# EAGLE board Papa_Soundie-Panel_v10 (EAGLE 7.7.0), part 1 of 7
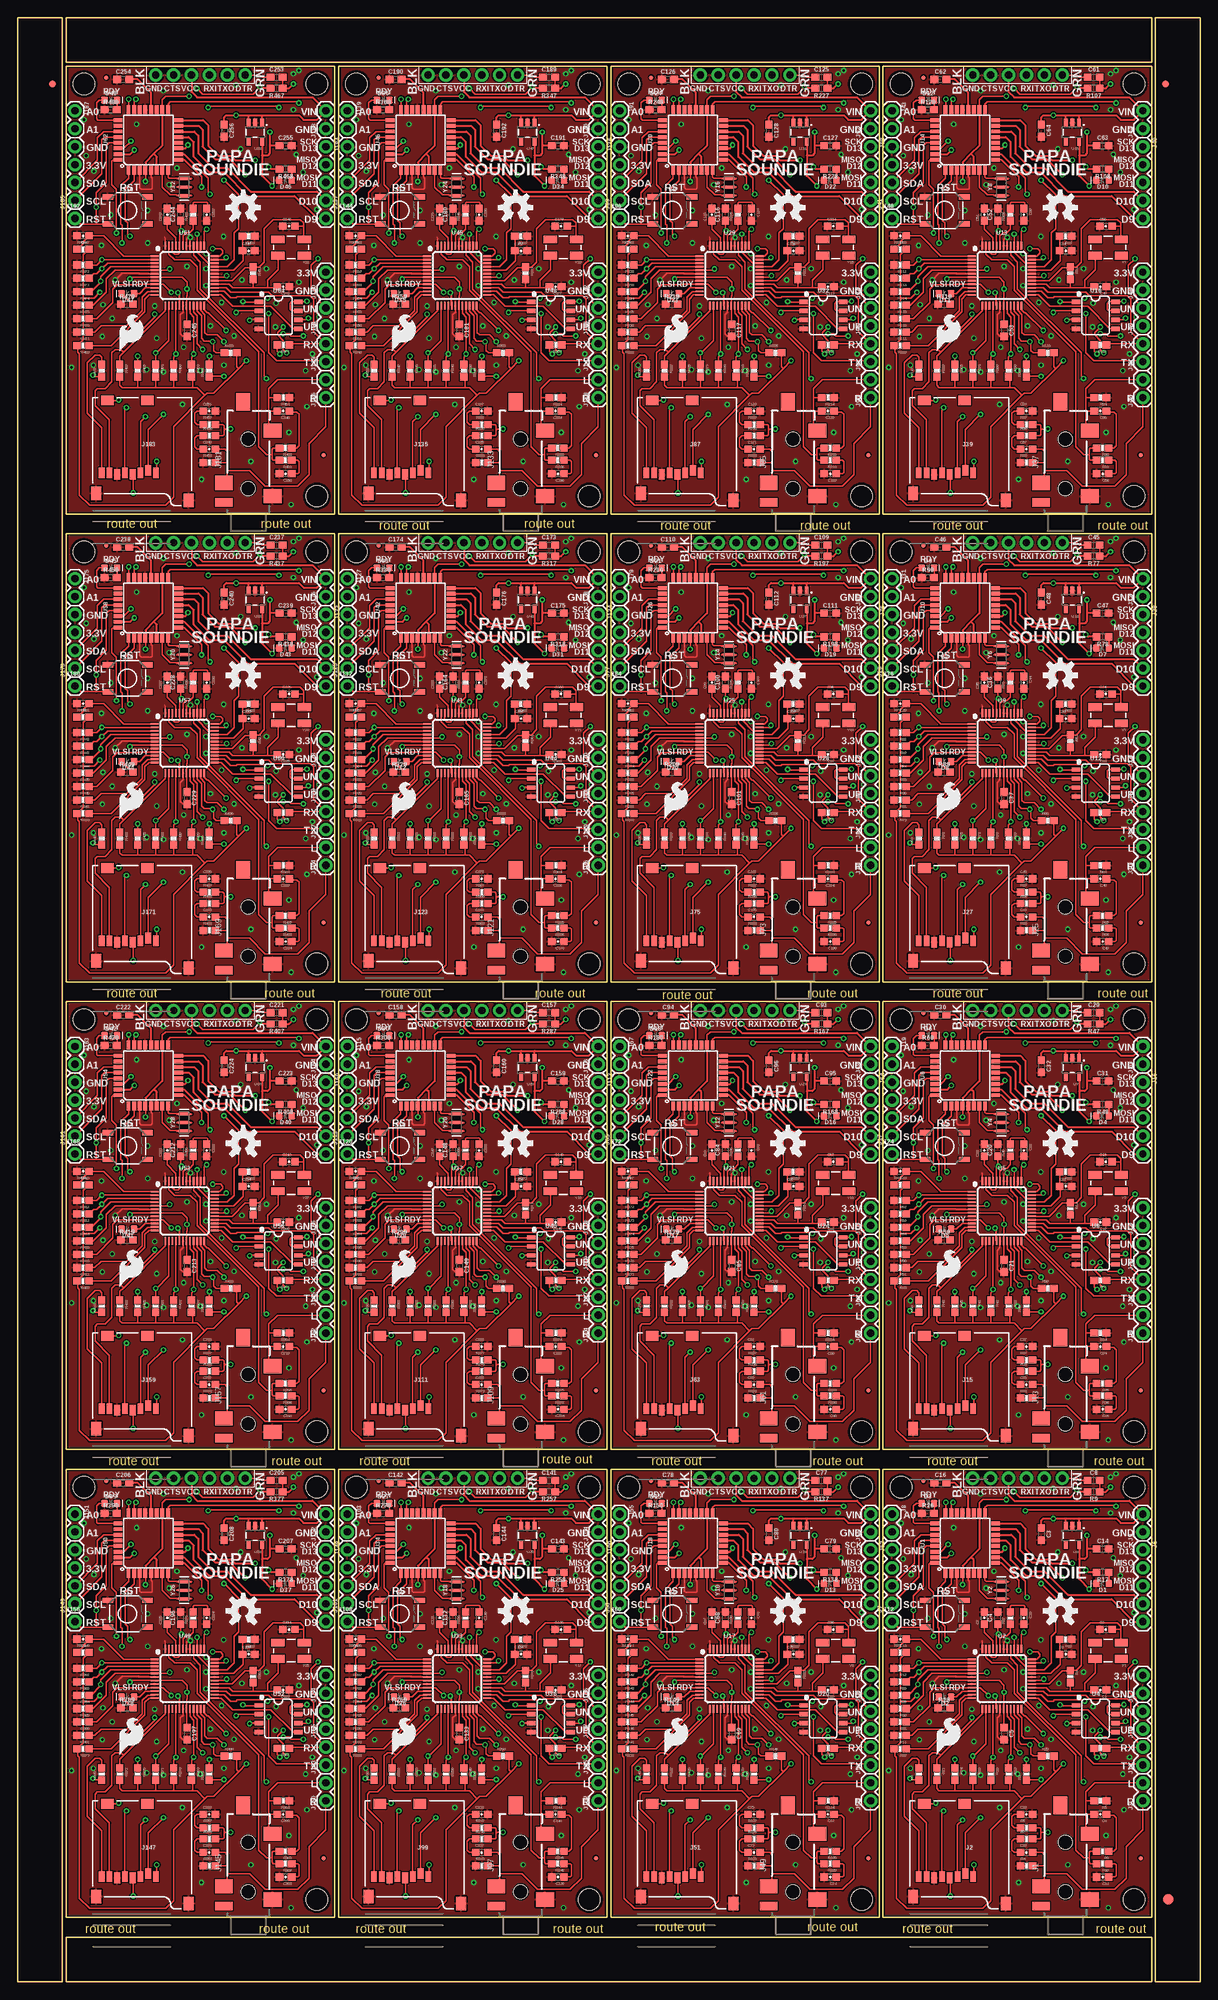
[diagram p0: board, top side]
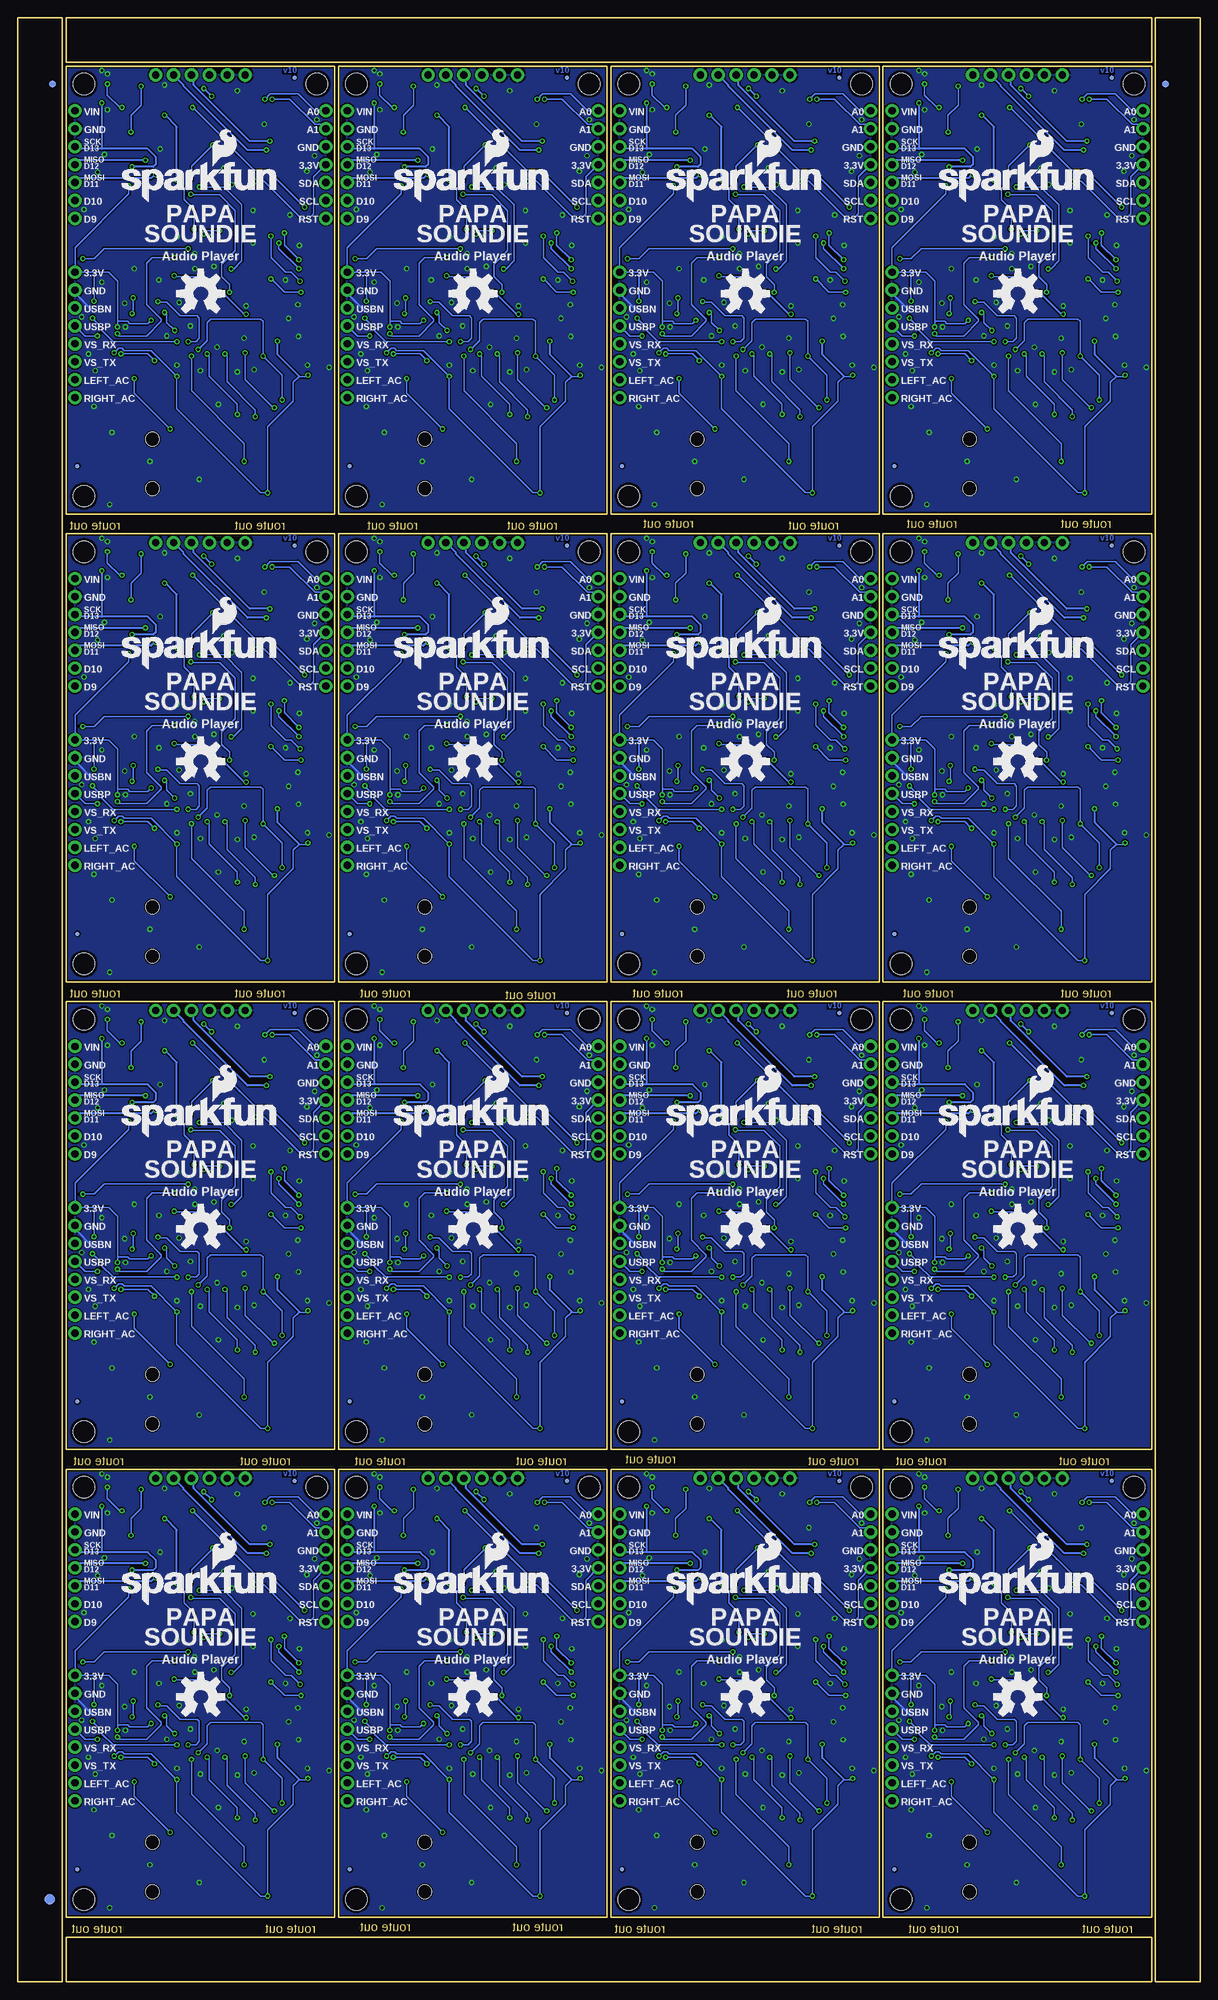
[diagram p1: board, bottom side, seen from below]

Size 167.64 x 278.38 mm. Coordinates in mm from the lower left corner, seen from the top.
Outline: 88.39,6.35 160.78,6.35 160.78,0 137.92,0
Outline: 140.46,0 6.86,0 6.86,6.35 90.93,6.35
Outline: 167.64,72.39 167.64,0 161.29,0 161.29,22.86
Outline: 161.29,20.32 161.29,278.38 167.64,278.38 167.64,69.85
Outline: 79.25,272.03 6.86,272.03 6.86,278.38 29.72,278.38
Outline: 27.18,278.38 160.78,278.38 160.78,272.03 76.71,272.03
Outline: 0,205.99 0,278.38 6.35,278.38 6.35,255.52
Outline: 6.35,258.06 6.35,0 0,0 0,208.53
Outline: 160.78,72.64 122.68,72.64 122.68,9.14 160.78,9.14 160.78,72.64
Outline: 160.78,138.94 122.68,138.94 122.68,75.44 160.78,75.44 160.78,138.94
Outline: 160.78,205.23 122.68,205.23 122.68,141.73 160.78,141.73 160.78,205.23
Outline: 160.78,271.53 122.68,271.53 122.68,208.03 160.78,208.03 160.78,271.53
Outline: 122.17,72.64 84.07,72.64 84.07,9.14 122.17,9.14 122.17,72.64
Outline: 122.17,138.94 84.07,138.94 84.07,75.44 122.17,75.44 122.17,138.94
Outline: 122.17,205.23 84.07,205.23 84.07,141.73 122.17,141.73 122.17,205.23
Outline: 122.17,271.53 84.07,271.53 84.07,208.03 122.17,208.03 122.17,271.53
Outline: 83.57,72.64 45.47,72.64 45.47,9.14 83.57,9.14 83.57,72.64
Outline: 83.57,138.94 45.47,138.94 45.47,75.44 83.57,75.44 83.57,138.94
Outline: 83.57,205.23 45.47,205.23 45.47,141.73 83.57,141.73 83.57,205.23
Outline: 83.57,271.53 45.47,271.53 45.47,208.03 83.57,208.03 83.57,271.53
Outline: 44.96,72.64 6.86,72.64 6.86,9.14 44.96,9.14 44.96,72.64
Outline: 44.96,138.94 6.86,138.94 6.86,75.44 44.96,75.44 44.96,138.94
Outline: 44.96,205.23 6.86,205.23 6.86,141.73 44.96,141.73 44.96,205.23
Outline: 44.96,271.53 6.86,271.53 6.86,208.03 44.96,208.03 44.96,271.53
Copper layers (1*16): Top 0.035mm / dielectric 1.5mm / Bottom 0.035mm
Design rules "SparkFun-2-layer-TIGHT": minimum track width 7mil, minimum drill 15mil, track to track 7mil, track to pad 7mil, pad to pad 7mil, via to via 7mil, smd to smd 7mil, copper to edge 7mil, drill to drill 7mil, minimum pad ring 7mil, minimum via ring 7mil, stop-mask expansion 4mil, vias tented up to drill 25mil, thermal gap 10mil

## Footprints (pad centres in the part's own frame; a part is rotated, then mirrored left to right if it is on the bottom)
0603-CAP = smd 1.1 x 1: 1 -0.85,0; 2 0.85,0
0603 = smd 1.1 x 1: 1 -0.85,0; 2 0.85,0
LED-0603 = smd 1 x 1: A -0.877,0; C 0.877,0
FIDUCIAL-1.5X3 = smd 1.5 x 1.5: 1 0,0
FIDUCIAL-1X2 = smd 1 x 1: 1 0,0
FIDUCIAL-MICRO = smd 0.635 x 0.635: 1 0,0
STAND-OFF-TIGHT = hole 3.048: 0,0
AUDIO-JACK-3.5MM-SMD = smd 2 x 2.5: RING 4.3,3.45; SLEEVE 2.4,-3.45; TIP 11.7,-3.45 | smd 1.2 x 2.5: RSH 1.5,3.45 | smd 2.5 x 2: TSH 15.75,0.75 | hole 2: 3.5,0; 10.5,0
MICRO-SD-SOCKET = smd 1.8 x 1.4: CD1 -2.05,0.4; CD2 -7.75,0.4 | smd 0.8 x 1.5: CS -7.84,10.3; DI -6.74,10.7; DO -2.34,10.7; GND -3.44,10.9; RSV1 -8.94,10.7; RSV2 -1.24,10.7; SCLK -4.54,10.7; VCC -5.64,10.9 | smd 1.4 x 1.9: GND1 -13.6,14.55; GND3 -0.45,13.55
1X02 = drill 1.016 pad 1.88: 1 0,0; 2 2.54,0
6_PIN_SERIAL_TARGET_SIDE_W_SILK = drill 1.016 pad 1.88: P$1 -6.35,0; P$2 -3.81,0; P$3 -1.27,0; P$4 1.27,0; P$5 3.81,0; P$6 6.35,0
1X05 = drill 1.016 pad 1.88: 1 0,0; 2 2.54,0; 3 5.08,0; 4 7.62,0; 5 10.16,0
1X04 = drill 1.016 pad 1.88: 1 0,0; 2 2.54,0; 3 5.08,0; 4 7.62,0
1X01 = drill 1.016 pad 1.88: 1 0,0
0603-RES = smd 1.1 x 1: 1 -0.85,0; 2 0.85,0
TACTILE_SWITCH_SMD_5.2MM = smd 1.524 x 0.762: 1 -2.794,1.905; 2 2.794,1.905; 3 -2.794,-1.905; 4 2.794,-1.905
TQFP32-08 = smd 1.27 x 0.559: 1 -4.293,2.8; 2 -4.293,2; 3 -4.293,1.2; 4 -4.293,0.4; 5 -4.293,-0.4; 6 -4.293,-1.2; 7 -4.293,-2; 8 -4.293,-2.8; 17 4.293,-2.8; 18 4.293,-2; 19 4.293,-1.2; 20 4.293,-0.4; 21 4.293,0.4; 22 4.293,1.2; 23 4.293,2; 24 4.293,2.8 | smd 0.559 x 1.27: 9 -2.8,-4.293; 10 -2,-4.293; 11 -1.2,-4.293; 12 -0.4,-4.293; 13 0.4,-4.293; 14 1.2,-4.293; 15 2,-4.293; 16 2.8,-4.293; 25 2.8,4.293; 26 2,4.293; 27 1.2,4.293; 28 0.4,4.293; 29 -0.4,4.293; 30 -1.2,4.293; 31 -2,4.293; 32 -2.8,4.293
LQFP-48 = smd 0.254 x 1.143: 1 -2.75,-4.25; 2 -2.25,-4.25; 3 -1.75,-4.25; 4 -1.25,-4.25; 5 -0.75,-4.25; 6 -0.25,-4.25; 7 0.25,-4.25; 8 0.75,-4.25; 9 1.25,-4.25; 10 1.75,-4.25; 11 2.25,-4.25; 12 2.75,-4.25; 25 2.75,4.25; 26 2.25,4.25; 27 1.75,4.25; 28 1.25,4.25; 29 0.75,4.25; 30 0.25,4.25; 31 -0.25,4.25; 32 -0.75,4.25; 33 -1.25,4.25; 34 -1.75,4.25; 35 -2.25,4.25; 36 -2.75,4.25 | smd 1.143 x 0.254: 13 4.25,-2.75; 14 4.25,-2.25; 15 4.25,-1.75; 16 4.25,-1.25; 17 4.25,-0.75; 18 4.25,-0.25; 19 4.25,0.25; 20 4.25,0.75; 21 4.25,1.25; 22 4.25,1.75; 23 4.25,2.25; 24 4.25,2.75; 37 -4.25,2.75; 38 -4.25,2.25; 39 -4.25,1.75; 40 -4.25,1.25; 41 -4.25,0.75; 42 -4.25,0.25; 43 -4.25,-0.25; 44 -4.25,-0.75; 45 -4.25,-1.25; 46 -4.25,-1.75; 47 -4.25,-2.25; 48 -4.25,-2.75
SOT23-5 = smd 0.55 x 1.2: 1 -0.95,-1.3; 2 0,-1.3; 3 0.95,-1.3; 4 0.95,1.3; 5 -0.95,1.3
SO08 = smd 0.6 x 1.2: 1 -1.905,-2.8; 2 -0.635,-2.8; 3 0.635,-2.8; 4 1.905,-2.8; 5 1.905,2.8; 6 0.635,2.8; 7 -0.635,2.8; 8 -1.905,2.8
CRYSTAL-SMD-5X3 = smd 1.9 x 1.1: 1 -1.85,-1.15; 2 1.85,-1.15; 3 1.85,1.15; 4 -1.85,1.15
RESONATOR-SMD-3.2X1.3 = smd 0.45 x 1.905: 1 -1.2,0; 2 0,0; 3 1.2,0

## Placement (x,y rotation side)
C1  22pF  [0603-CAP]  153.48,41.37 180 top
C2  22pF  [0603-CAP]  154.27,49.94 0 top
C3  10uF  [0603]  145.13,63.47 270 top
C4  10uF  [0603]  138.94,51.56 90 top
C5  10uF  [0603]  139.83,35.18 270 top
C6  1.0uF  [0603-CAP]  148.56,46.45 0 top
C7  1.0uF  [0603-CAP]  137.03,51.56 90 top
C8  0.1uF  [0603]  152.53,71.06 0 top
C9  10uF  [0603-CAP]  153.48,23.75 180 top
C10  10uF  [0603-CAP]  143,18.35 0 top
C11  10nF  [0603-CAP]  153.8,14.86 180 top
C12  10nF  [0603-CAP]  143,23.75 0 top
C13  10uF  [0603-CAP]  125.09,48.58 180 top
C14  2.2uF  [0603]  153.8,61.37 0 top
C15  47nF  [0603-CAP]  142.62,51.56 270 top
C16  0.1uF  [0603]  130.78,70.74 0 top
C17  22pF  [0603-CAP]  153.48,107.66 180 top
C18  22pF  [0603-CAP]  154.27,116.24 0 top
C19  1.0uF  [0603-CAP]  137.03,117.86 90 top
C20  10uF  [0603]  138.94,117.86 90 top
C21  10uF  [0603]  139.83,101.47 270 top
C22  1.0uF  [0603-CAP]  148.56,112.74 0 top
C23  10uF  [0603-CAP]  125.09,114.87 180 top
C24  10uF  [0603-CAP]  153.48,90.04 180 top
C25  10uF  [0603-CAP]  143,84.65 0 top
C26  10nF  [0603-CAP]  153.8,81.15 180 top
C27  10nF  [0603-CAP]  143,90.04 0 top
C28  47nF  [0603-CAP]  142.62,117.86 270 top
C29  0.1uF  [0603]  152.53,137.35 0 top
C30  0.1uF  [0603]  130.78,137.03 0 top
C31  2.2uF  [0603]  153.8,127.67 0 top
C32  10uF  [0603]  145.13,129.76 270 top
C33  22pF  [0603-CAP]  153.48,173.96 180 top
C34  22pF  [0603-CAP]  154.27,182.53 0 top
C35  1.0uF  [0603-CAP]  137.03,184.15 90 top
C36  10uF  [0603]  138.94,184.15 90 top
C37  10uF  [0603]  139.83,167.77 270 top
C38  1.0uF  [0603-CAP]  148.56,179.04 0 top
C39  10uF  [0603-CAP]  125.09,181.17 180 top
C40  10uF  [0603-CAP]  153.48,156.34 180 top
C41  10uF  [0603-CAP]  143,150.94 0 top
C42  10nF  [0603-CAP]  153.8,147.45 180 top
C43  10nF  [0603-CAP]  143,156.34 0 top
C44  47nF  [0603-CAP]  142.62,184.15 270 top
C45  0.1uF  [0603]  152.53,203.64 0 top
C46  0.1uF  [0603]  130.78,203.33 0 top
C47  2.2uF  [0603]  153.8,193.96 0 top
C48  10uF  [0603]  145.13,196.06 270 top
C49  22pF  [0603-CAP]  153.48,240.25 180 top
C50  22pF  [0603-CAP]  154.27,248.82 0 top
C51  1.0uF  [0603-CAP]  137.03,250.44 90 top
C52  10uF  [0603]  138.94,250.44 90 top
C53  10uF  [0603]  139.83,234.06 270 top
C54  1.0uF  [0603-CAP]  148.56,245.33 0 top
C55  10uF  [0603-CAP]  125.09,247.46 180 top
C56  10uF  [0603-CAP]  153.48,222.63 180 top
C57  10uF  [0603-CAP]  143,217.23 0 top
C58  10nF  [0603-CAP]  153.8,213.74 180 top
C59  10nF  [0603-CAP]  143,222.63 0 top
C60  47nF  [0603-CAP]  142.62,250.44 270 top
C61  0.1uF  [0603]  152.53,269.94 0 top
C62  0.1uF  [0603]  130.78,269.62 0 top
C63  2.2uF  [0603]  153.8,260.25 0 top
C64  10uF  [0603]  145.13,262.35 270 top
C65  22pF  [0603-CAP]  114.87,41.37 180 top
C66  22pF  [0603-CAP]  115.67,49.94 0 top
C67  1.0uF  [0603-CAP]  98.42,51.56 90 top
C68  10uF  [0603]  100.33,51.56 90 top
C69  10uF  [0603]  101.22,35.18 270 top
C70  1.0uF  [0603-CAP]  109.95,46.45 0 top
C71  10uF  [0603-CAP]  86.49,48.58 180 top
C72  10uF  [0603-CAP]  114.87,23.75 180 top
C73  10uF  [0603-CAP]  104.39,18.35 0 top
C74  10nF  [0603-CAP]  115.19,14.86 180 top
C75  10nF  [0603-CAP]  104.39,23.75 0 top
C76  47nF  [0603-CAP]  104.01,51.56 270 top
C77  0.1uF  [0603]  113.92,71.06 0 top
C78  0.1uF  [0603]  92.17,70.74 0 top
C79  2.2uF  [0603]  115.19,61.37 0 top
C80  10uF  [0603]  106.52,63.47 270 top
C81  22pF  [0603-CAP]  114.87,107.66 180 top
C82  22pF  [0603-CAP]  115.67,116.24 0 top
C83  1.0uF  [0603-CAP]  98.42,117.86 90 top
C84  10uF  [0603]  100.33,117.86 90 top
C85  10uF  [0603]  101.22,101.47 270 top
C86  1.0uF  [0603-CAP]  109.95,112.74 0 top
C87  10uF  [0603-CAP]  86.49,114.87 180 top
C88  10uF  [0603-CAP]  114.87,90.04 180 top
C89  10uF  [0603-CAP]  104.39,84.65 0 top
C90  10nF  [0603-CAP]  115.19,81.15 180 top
C91  10nF  [0603-CAP]  104.39,90.04 0 top
C92  47nF  [0603-CAP]  104.01,117.86 270 top
C93  0.1uF  [0603]  113.92,137.35 0 top
C94  0.1uF  [0603]  92.17,137.03 0 top
C95  2.2uF  [0603]  115.19,127.67 0 top
C96  10uF  [0603]  106.52,129.76 270 top
C97  22pF  [0603-CAP]  114.87,173.96 180 top
C98  22pF  [0603-CAP]  115.67,182.53 0 top
C99  1.0uF  [0603-CAP]  98.42,184.15 90 top
C100  10uF  [0603]  100.33,184.15 90 top
C101  10uF  [0603]  101.22,167.77 270 top
C102  1.0uF  [0603-CAP]  109.95,179.04 0 top
C103  10uF  [0603-CAP]  86.49,181.17 180 top
C104  10uF  [0603-CAP]  114.87,156.34 180 top
C105  10uF  [0603-CAP]  104.39,150.94 0 top
C106  10nF  [0603-CAP]  115.19,147.45 180 top
C107  10nF  [0603-CAP]  104.39,156.34 0 top
C108  47nF  [0603-CAP]  104.01,184.15 270 top
C109  0.1uF  [0603]  113.92,203.64 0 top
C110  0.1uF  [0603]  92.17,203.33 0 top
C111  2.2uF  [0603]  115.19,193.96 0 top
C112  10uF  [0603]  106.52,196.06 270 top
C113  22pF  [0603-CAP]  114.87,240.25 180 top
C114  22pF  [0603-CAP]  115.67,248.82 0 top
C115  1.0uF  [0603-CAP]  98.42,250.44 90 top
C116  10uF  [0603]  100.33,250.44 90 top
C117  10uF  [0603]  101.22,234.06 270 top
C118  1.0uF  [0603-CAP]  109.95,245.33 0 top
C119  10uF  [0603-CAP]  86.49,247.46 180 top
C120  10uF  [0603-CAP]  114.87,222.63 180 top
C121  10uF  [0603-CAP]  104.39,217.23 0 top
C122  10nF  [0603-CAP]  115.19,213.74 180 top
C123  10nF  [0603-CAP]  104.39,222.63 0 top
C124  47nF  [0603-CAP]  104.01,250.44 270 top
C125  0.1uF  [0603]  113.92,269.94 0 top
C126  0.1uF  [0603]  92.17,269.62 0 top
C127  2.2uF  [0603]  115.19,260.25 0 top
C128  10uF  [0603]  106.52,262.35 270 top
C129  22pF  [0603-CAP]  76.26,41.37 180 top
C130  22pF  [0603-CAP]  77.06,49.94 0 top
C131  1.0uF  [0603-CAP]  59.82,51.56 90 top
C132  10uF  [0603]  61.72,51.56 90 top
C133  10uF  [0603]  62.61,35.18 270 top
C134  1.0uF  [0603-CAP]  71.34,46.45 0 top
C135  10uF  [0603-CAP]  47.88,48.58 180 top
C136  10uF  [0603-CAP]  76.26,23.75 180 top
C137  10uF  [0603-CAP]  65.79,18.35 0 top
C138  10nF  [0603-CAP]  76.58,14.86 180 top
C139  10nF  [0603-CAP]  65.79,23.75 0 top
C140  47nF  [0603-CAP]  65.41,51.56 270 top
C141  0.1uF  [0603]  75.31,71.06 0 top
C142  0.1uF  [0603]  53.56,70.74 0 top
C143  2.2uF  [0603]  76.58,61.37 0 top
C144  10uF  [0603]  67.91,63.47 270 top
C145  22pF  [0603-CAP]  76.26,107.66 180 top
C146  22pF  [0603-CAP]  77.06,116.24 0 top
C147  1.0uF  [0603-CAP]  59.82,117.86 90 top
C148  10uF  [0603]  61.72,117.86 90 top
C149  10uF  [0603]  62.61,101.47 270 top
C150  1.0uF  [0603-CAP]  71.34,112.74 0 top
C151  10uF  [0603-CAP]  47.88,114.87 180 top
C152  10uF  [0603-CAP]  76.26,90.04 180 top
C153  10uF  [0603-CAP]  65.79,84.65 0 top
C154  10nF  [0603-CAP]  76.58,81.15 180 top
C155  10nF  [0603-CAP]  65.79,90.04 0 top
C156  47nF  [0603-CAP]  65.41,117.86 270 top
C157  0.1uF  [0603]  75.31,137.35 0 top
C158  0.1uF  [0603]  53.56,137.03 0 top
C159  2.2uF  [0603]  76.58,127.67 0 top
C160  10uF  [0603]  67.91,129.76 270 top
C161  22pF  [0603-CAP]  76.26,173.96 180 top
C162  22pF  [0603-CAP]  77.06,182.53 0 top
C163  1.0uF  [0603-CAP]  59.82,184.15 90 top
C164  10uF  [0603]  61.72,184.15 90 top
C165  10uF  [0603]  62.61,167.77 270 top
C166  1.0uF  [0603-CAP]  71.34,179.04 0 top
C167  10uF  [0603-CAP]  47.88,181.17 180 top
C168  10uF  [0603-CAP]  76.26,156.34 180 top
C169  10uF  [0603-CAP]  65.79,150.94 0 top
C170  10nF  [0603-CAP]  76.58,147.45 180 top
C171  10nF  [0603-CAP]  65.79,156.34 0 top
C172  47nF  [0603-CAP]  65.41,184.15 270 top
C173  0.1uF  [0603]  75.31,203.64 0 top
C174  0.1uF  [0603]  53.56,203.33 0 top
C175  2.2uF  [0603]  76.58,193.96 0 top
C176  10uF  [0603]  67.91,196.06 270 top
C177  22pF  [0603-CAP]  76.26,240.25 180 top
C178  22pF  [0603-CAP]  77.06,248.82 0 top
C179  1.0uF  [0603-CAP]  59.82,250.44 90 top
C180  10uF  [0603]  61.72,250.44 90 top
C181  10uF  [0603]  62.61,234.06 270 top
C182  1.0uF  [0603-CAP]  71.34,245.33 0 top
C183  10uF  [0603-CAP]  47.88,247.46 180 top
C184  10uF  [0603-CAP]  76.26,222.63 180 top
C185  10uF  [0603-CAP]  65.79,217.23 0 top
C186  10nF  [0603-CAP]  76.58,213.74 180 top
C187  10nF  [0603-CAP]  65.79,222.63 0 top
C188  47nF  [0603-CAP]  65.41,250.44 270 top
C189  0.1uF  [0603]  75.31,269.94 0 top
C190  0.1uF  [0603]  53.56,269.62 0 top
C191  2.2uF  [0603]  76.58,260.25 0 top
C192  10uF  [0603]  67.91,262.35 270 top
C193  22pF  [0603-CAP]  37.66,41.37 180 top
C194  22pF  [0603-CAP]  38.45,49.94 0 top
C195  1.0uF  [0603-CAP]  21.21,51.56 90 top
C196  10uF  [0603]  23.11,51.56 90 top
C197  10uF  [0603]  24,35.18 270 top
C198  1.0uF  [0603-CAP]  32.73,46.45 0 top
C199  10uF  [0603-CAP]  9.27,48.58 180 top
C200  10uF  [0603-CAP]  37.66,23.75 180 top
C201  10uF  [0603-CAP]  27.18,18.35 0 top
C202  10nF  [0603-CAP]  37.97,14.86 180 top
C203  10nF  [0603-CAP]  27.18,23.75 0 top
C204  47nF  [0603-CAP]  26.8,51.56 270 top
C205  0.1uF  [0603]  36.7,71.06 0 top
C206  0.1uF  [0603]  14.95,70.74 0 top
C207  2.2uF  [0603]  37.97,61.37 0 top
C208  10uF  [0603]  29.31,63.47 270 top
C209  22pF  [0603-CAP]  37.66,107.66 180 top
C210  22pF  [0603-CAP]  38.45,116.24 0 top
C211  1.0uF  [0603-CAP]  21.21,117.86 90 top
C212  10uF  [0603]  23.11,117.86 90 top
C213  10uF  [0603]  24,101.47 270 top
C214  1.0uF  [0603-CAP]  32.73,112.74 0 top
C215  10uF  [0603-CAP]  9.27,114.87 180 top
C216  10uF  [0603-CAP]  37.66,90.04 180 top
C217  10uF  [0603-CAP]  27.18,84.65 0 top
C218  10nF  [0603-CAP]  37.97,81.15 180 top
C219  10nF  [0603-CAP]  27.18,90.04 0 top
C220  47nF  [0603-CAP]  26.8,117.86 270 top
C221  0.1uF  [0603]  36.7,137.35 0 top
C222  0.1uF  [0603]  14.95,137.03 0 top
C223  2.2uF  [0603]  37.97,127.67 0 top
C224  10uF  [0603]  29.31,129.76 270 top
C225  22pF  [0603-CAP]  37.66,173.96 180 top
C226  22pF  [0603-CAP]  38.45,182.53 0 top
C227  1.0uF  [0603-CAP]  21.21,184.15 90 top
C228  10uF  [0603]  23.11,184.15 90 top
C229  10uF  [0603]  24,167.77 270 top
C230  1.0uF  [0603-CAP]  32.73,179.04 0 top
C231  10uF  [0603-CAP]  9.27,181.17 180 top
C232  10uF  [0603-CAP]  37.66,156.34 180 top
C233  10uF  [0603-CAP]  27.18,150.94 0 top
C234  10nF  [0603-CAP]  37.97,147.45 180 top
C235  10nF  [0603-CAP]  27.18,156.34 0 top
C236  47nF  [0603-CAP]  26.8,184.15 270 top
C237  0.1uF  [0603]  36.7,203.64 0 top
C238  0.1uF  [0603]  14.95,203.33 0 top
C239  2.2uF  [0603]  37.97,193.96 0 top
C240  10uF  [0603]  29.31,196.06 270 top
C241  22pF  [0603-CAP]  37.66,240.25 180 top
C242  22pF  [0603-CAP]  38.45,248.82 0 top
C243  1.0uF  [0603-CAP]  21.21,250.44 90 top
C244  10uF  [0603]  23.11,250.44 90 top
C245  10uF  [0603]  24,234.06 270 top
C246  1.0uF  [0603-CAP]  32.73,245.33 0 top
C247  10uF  [0603-CAP]  9.27,247.46 180 top
C248  10uF  [0603-CAP]  37.66,222.63 180 top
C249  10uF  [0603-CAP]  27.18,217.23 0 top
C250  10nF  [0603-CAP]  37.97,213.74 180 top
C251  10nF  [0603-CAP]  27.18,222.63 0 top
C252  47nF  [0603-CAP]  26.8,250.44 270 top
C253  0.1uF  [0603]  36.7,269.94 0 top
C254  0.1uF  [0603]  14.95,269.62 0 top
C255  2.2uF  [0603]  37.97,260.25 0 top
C256  10uF  [0603]  29.31,262.35 270 top
D1  GREEN  [LED-0603]  153.8,56.45 180 top
D2  RED  [LED-0603]  131.44,40.39 180 top
D3  RED  [LED-0603]  129.03,67.82 0 top
D4  GREEN  [LED-0603]  153.8,122.75 180 top
D5  RED  [LED-0603]  131.44,106.68 180 top
D6  RED  [LED-0603]  129.03,134.11 0 top
D7  GREEN  [LED-0603]  153.8,189.04 180 top
D8  RED  [LED-0603]  131.44,172.97 180 top
D9  RED  [LED-0603]  129.03,200.41 0 top
D10  GREEN  [LED-0603]  153.8,255.33 180 top
D11  RED  [LED-0603]  131.44,239.27 180 top
D12  RED  [LED-0603]  129.03,266.7 0 top
D13  GREEN  [LED-0603]  115.19,56.45 180 top
D14  RED  [LED-0603]  92.84,40.39 180 top
D15  RED  [LED-0603]  90.42,67.82 0 top
D16  GREEN  [LED-0603]  115.19,122.75 180 top
D17  RED  [LED-0603]  92.84,106.68 180 top
D18  RED  [LED-0603]  90.42,134.11 0 top
D19  GREEN  [LED-0603]  115.19,189.04 180 top
D20  RED  [LED-0603]  92.84,172.97 180 top
D21  RED  [LED-0603]  90.42,200.41 0 top
D22  GREEN  [LED-0603]  115.19,255.33 180 top
D23  RED  [LED-0603]  92.84,239.27 180 top
D24  RED  [LED-0603]  90.42,266.7 0 top
D25  GREEN  [LED-0603]  76.58,56.45 180 top
D26  RED  [LED-0603]  54.23,40.39 180 top
D27  RED  [LED-0603]  51.82,67.82 0 top
D28  GREEN  [LED-0603]  76.58,122.75 180 top
D29  RED  [LED-0603]  54.23,106.68 180 top
D30  RED  [LED-0603]  51.82,134.11 0 top
D31  GREEN  [LED-0603]  76.58,189.04 180 top
D32  RED  [LED-0603]  54.23,172.97 180 top
D33  RED  [LED-0603]  51.82,200.41 0 top
D34  GREEN  [LED-0603]  76.58,255.33 180 top
D35  RED  [LED-0603]  54.23,239.27 180 top
D36  RED  [LED-0603]  51.82,266.7 0 top
D37  GREEN  [LED-0603]  37.97,56.45 180 top
D38  RED  [LED-0603]  15.62,40.39 180 top
D39  RED  [LED-0603]  13.21,67.82 0 top
D40  GREEN  [LED-0603]  37.97,122.75 180 top
D41  RED  [LED-0603]  15.62,106.68 180 top
D42  RED  [LED-0603]  13.21,134.11 0 top
D43  GREEN  [LED-0603]  37.97,189.04 180 top
D44  RED  [LED-0603]  15.62,172.97 180 top
D45  RED  [LED-0603]  13.21,200.41 0 top
D46  GREEN  [LED-0603]  37.97,255.33 180 top
D47  RED  [LED-0603]  15.62,239.27 180 top
D48  RED  [LED-0603]  13.21,266.7 0 top
E$1  [FIDUCIAL-1.5X3]  163.07,11.68 90 top
E$2  [FIDUCIAL-1.5X3]  163.07,11.68 270 bottom
E$3  [FIDUCIAL-1X2]  162.69,268.99 180 bottom
E$4  [FIDUCIAL-1X2]  4.95,268.99 0 bottom
E$6  [FIDUCIAL-1X2]  162.69,268.99 0 top
E$7  [FIDUCIAL-1X2]  4.95,268.99 180 top
FD1  FIDUCIALUFIDUCIAL  [FIDUCIAL-MICRO]  128.4,70.99 90 top
FD2  FIDUCIALUFIDUCIAL  [FIDUCIAL-MICRO]  159.19,17.53 90 top
FD3  FIDUCIALUFIDUCIAL  [FIDUCIAL-MICRO]  128.4,70.99 180 bottom
FD4  FIDUCIALUFIDUCIAL  [FIDUCIAL-MICRO]  159.16,15.94 180 bottom
FD5  FIDUCIALUFIDUCIAL  [FIDUCIAL-MICRO]  128.4,137.29 90 top
FD6  FIDUCIALUFIDUCIAL  [FIDUCIAL-MICRO]  159.19,83.82 90 top
FD7  FIDUCIALUFIDUCIAL  [FIDUCIAL-MICRO]  128.4,137.29 180 bottom
FD8  FIDUCIALUFIDUCIAL  [FIDUCIAL-MICRO]  159.16,82.23 180 bottom
FD9  FIDUCIALUFIDUCIAL  [FIDUCIAL-MICRO]  128.4,203.58 90 top
FD10  FIDUCIALUFIDUCIAL  [FIDUCIAL-MICRO]  159.19,150.11 90 top
FD11  FIDUCIALUFIDUCIAL  [FIDUCIAL-MICRO]  128.4,203.58 180 bottom
FD12  FIDUCIALUFIDUCIAL  [FIDUCIAL-MICRO]  159.16,148.53 180 bottom
FD13  FIDUCIALUFIDUCIAL  [FIDUCIAL-MICRO]  128.4,269.88 90 top
FD14  FIDUCIALUFIDUCIAL  [FIDUCIAL-MICRO]  159.19,216.41 90 top
FD15  FIDUCIALUFIDUCIAL  [FIDUCIAL-MICRO]  128.4,269.88 180 bottom
FD16  FIDUCIALUFIDUCIAL  [FIDUCIAL-MICRO]  159.16,214.82 180 bottom
FD17  FIDUCIALUFIDUCIAL  [FIDUCIAL-MICRO]  89.79,70.99 90 top
FD18  FIDUCIALUFIDUCIAL  [FIDUCIAL-MICRO]  120.59,17.53 90 top
FD19  FIDUCIALUFIDUCIAL  [FIDUCIAL-MICRO]  89.79,70.99 180 bottom
FD20  FIDUCIALUFIDUCIAL  [FIDUCIAL-MICRO]  120.55,15.94 180 bottom
FD21  FIDUCIALUFIDUCIAL  [FIDUCIAL-MICRO]  89.79,137.29 90 top
FD22  FIDUCIALUFIDUCIAL  [FIDUCIAL-MICRO]  120.59,83.82 90 top
FD23  FIDUCIALUFIDUCIAL  [FIDUCIAL-MICRO]  89.79,137.29 180 bottom
FD24  FIDUCIALUFIDUCIAL  [FIDUCIAL-MICRO]  120.55,82.23 180 bottom
FD25  FIDUCIALUFIDUCIAL  [FIDUCIAL-MICRO]  89.79,203.58 90 top
FD26  FIDUCIALUFIDUCIAL  [FIDUCIAL-MICRO]  120.59,150.11 90 top
FD27  FIDUCIALUFIDUCIAL  [FIDUCIAL-MICRO]  89.79,203.58 180 bottom
FD28  FIDUCIALUFIDUCIAL  [FIDUCIAL-MICRO]  120.55,148.53 180 bottom
FD29  FIDUCIALUFIDUCIAL  [FIDUCIAL-MICRO]  89.79,269.88 90 top
FD30  FIDUCIALUFIDUCIAL  [FIDUCIAL-MICRO]  120.59,216.41 90 top
FD31  FIDUCIALUFIDUCIAL  [FIDUCIAL-MICRO]  89.79,269.88 180 bottom
FD32  FIDUCIALUFIDUCIAL  [FIDUCIAL-MICRO]  120.55,214.82 180 bottom
FD33  FIDUCIALUFIDUCIAL  [FIDUCIAL-MICRO]  51.18,70.99 90 top
FD34  FIDUCIALUFIDUCIAL  [FIDUCIAL-MICRO]  81.98,17.53 90 top
FD35  FIDUCIALUFIDUCIAL  [FIDUCIAL-MICRO]  51.18,70.99 180 bottom
FD36  FIDUCIALUFIDUCIAL  [FIDUCIAL-MICRO]  81.95,15.94 180 bottom
FD37  FIDUCIALUFIDUCIAL  [FIDUCIAL-MICRO]  51.18,137.29 90 top
FD38  FIDUCIALUFIDUCIAL  [FIDUCIAL-MICRO]  81.98,83.82 90 top
FD39  FIDUCIALUFIDUCIAL  [FIDUCIAL-MICRO]  51.18,137.29 180 bottom
FD40  FIDUCIALUFIDUCIAL  [FIDUCIAL-MICRO]  81.95,82.23 180 bottom
FD41  FIDUCIALUFIDUCIAL  [FIDUCIAL-MICRO]  51.18,203.58 90 top
FD42  FIDUCIALUFIDUCIAL  [FIDUCIAL-MICRO]  81.98,150.11 90 top
FD43  FIDUCIALUFIDUCIAL  [FIDUCIAL-MICRO]  51.18,203.58 180 bottom
FD44  FIDUCIALUFIDUCIAL  [FIDUCIAL-MICRO]  81.95,148.53 180 bottom
FD45  FIDUCIALUFIDUCIAL  [FIDUCIAL-MICRO]  51.18,269.88 90 top
FD46  FIDUCIALUFIDUCIAL  [FIDUCIAL-MICRO]  81.98,216.41 90 top
FD47  FIDUCIALUFIDUCIAL  [FIDUCIAL-MICRO]  51.18,269.88 180 bottom
FD48  FIDUCIALUFIDUCIAL  [FIDUCIAL-MICRO]  81.95,214.82 180 bottom
FD49  FIDUCIALUFIDUCIAL  [FIDUCIAL-MICRO]  12.57,70.99 90 top
FD50  FIDUCIALUFIDUCIAL  [FIDUCIAL-MICRO]  43.37,17.53 90 top
FD51  FIDUCIALUFIDUCIAL  [FIDUCIAL-MICRO]  12.57,70.99 180 bottom
FD52  FIDUCIALUFIDUCIAL  [FIDUCIAL-MICRO]  43.34,15.94 180 bottom
FD53  FIDUCIALUFIDUCIAL  [FIDUCIAL-MICRO]  12.57,137.29 90 top
FD54  FIDUCIALUFIDUCIAL  [FIDUCIAL-MICRO]  43.37,83.82 90 top
FD55  FIDUCIALUFIDUCIAL  [FIDUCIAL-MICRO]  12.57,137.29 180 bottom
FD56  FIDUCIALUFIDUCIAL  [FIDUCIAL-MICRO]  43.34,82.23 180 bottom
FD57  FIDUCIALUFIDUCIAL  [FIDUCIAL-MICRO]  12.57,203.58 90 top
FD58  FIDUCIALUFIDUCIAL  [FIDUCIAL-MICRO]  43.37,150.11 90 top
FD59  FIDUCIALUFIDUCIAL  [FIDUCIAL-MICRO]  12.57,203.58 180 bottom
FD60  FIDUCIALUFIDUCIAL  [FIDUCIAL-MICRO]  43.34,148.53 180 bottom
FD61  FIDUCIALUFIDUCIAL  [FIDUCIAL-MICRO]  12.57,269.88 90 top
FD62  FIDUCIALUFIDUCIAL  [FIDUCIAL-MICRO]  43.37,216.41 90 top
FD63  FIDUCIALUFIDUCIAL  [FIDUCIAL-MICRO]  12.57,269.88 180 bottom
FD64  FIDUCIALUFIDUCIAL  [FIDUCIAL-MICRO]  43.34,214.82 180 bottom
H1  STAND-OFFTIGHT  [STAND-OFF-TIGHT]  158.24,70.1 90 top
H2  STAND-OFFTIGHT  [STAND-OFF-TIGHT]  125.22,70.1 180 top
H3  STAND-OFFTIGHT  [STAND-OFF-TIGHT]  158.24,11.68 0 top
H4  STAND-OFFTIGHT  [STAND-OFF-TIGHT]  158.24,136.4 90 top
H5  STAND-OFFTIGHT  [STAND-OFF-TIGHT]  125.22,136.4 180 top
H6  STAND-OFFTIGHT  [STAND-OFF-TIGHT]  158.24,77.98 0 top
H7  STAND-OFFTIGHT  [STAND-OFF-TIGHT]  158.24,202.69 90 top
H8  STAND-OFFTIGHT  [STAND-OFF-TIGHT]  125.22,202.69 180 top
H9  STAND-OFFTIGHT  [STAND-OFF-TIGHT]  158.24,144.27 0 top
H10  STAND-OFFTIGHT  [STAND-OFF-TIGHT]  158.24,268.99 90 top
H11  STAND-OFFTIGHT  [STAND-OFF-TIGHT]  125.22,268.99 180 top
H12  STAND-OFFTIGHT  [STAND-OFF-TIGHT]  158.24,210.57 0 top
H13  STAND-OFFTIGHT  [STAND-OFF-TIGHT]  119.63,70.1 90 top
H14  STAND-OFFTIGHT  [STAND-OFF-TIGHT]  86.61,70.1 180 top
H15  STAND-OFFTIGHT  [STAND-OFF-TIGHT]  119.63,11.68 0 top
H16  STAND-OFFTIGHT  [STAND-OFF-TIGHT]  119.63,136.4 90 top
H17  STAND-OFFTIGHT  [STAND-OFF-TIGHT]  86.61,136.4 180 top
H18  STAND-OFFTIGHT  [STAND-OFF-TIGHT]  119.63,77.98 0 top
H19  STAND-OFFTIGHT  [STAND-OFF-TIGHT]  119.63,202.69 90 top
H20  STAND-OFFTIGHT  [STAND-OFF-TIGHT]  86.61,202.69 180 top
H21  STAND-OFFTIGHT  [STAND-OFF-TIGHT]  119.63,144.27 0 top
H22  STAND-OFFTIGHT  [STAND-OFF-TIGHT]  119.63,268.99 90 top
H23  STAND-OFFTIGHT  [STAND-OFF-TIGHT]  86.61,268.99 180 top
H24  STAND-OFFTIGHT  [STAND-OFF-TIGHT]  119.63,210.57 0 top
H25  STAND-OFFTIGHT  [STAND-OFF-TIGHT]  81.03,70.1 90 top
H26  STAND-OFFTIGHT  [STAND-OFF-TIGHT]  48.01,70.1 180 top
H27  STAND-OFFTIGHT  [STAND-OFF-TIGHT]  81.03,11.68 0 top
H28  STAND-OFFTIGHT  [STAND-OFF-TIGHT]  81.03,136.4 90 top
H29  STAND-OFFTIGHT  [STAND-OFF-TIGHT]  48.01,136.4 180 top
H30  STAND-OFFTIGHT  [STAND-OFF-TIGHT]  81.03,77.98 0 top
H31  STAND-OFFTIGHT  [STAND-OFF-TIGHT]  81.03,202.69 90 top
H32  STAND-OFFTIGHT  [STAND-OFF-TIGHT]  48.01,202.69 180 top
H33  STAND-OFFTIGHT  [STAND-OFF-TIGHT]  81.03,144.27 0 top
H34  STAND-OFFTIGHT  [STAND-OFF-TIGHT]  81.03,268.99 90 top
H35  STAND-OFFTIGHT  [STAND-OFF-TIGHT]  48.01,268.99 180 top
H36  STAND-OFFTIGHT  [STAND-OFF-TIGHT]  81.03,210.57 0 top
H37  STAND-OFFTIGHT  [STAND-OFF-TIGHT]  42.42,70.1 90 top
H38  STAND-OFFTIGHT  [STAND-OFF-TIGHT]  9.4,70.1 180 top
H39  STAND-OFFTIGHT  [STAND-OFF-TIGHT]  42.42,11.68 0 top
H40  STAND-OFFTIGHT  [STAND-OFF-TIGHT]  42.42,136.4 90 top
H41  STAND-OFFTIGHT  [STAND-OFF-TIGHT]  9.4,136.4 180 top
H42  STAND-OFFTIGHT  [STAND-OFF-TIGHT]  42.42,77.98 0 top
H43  STAND-OFFTIGHT  [STAND-OFF-TIGHT]  42.42,202.69 90 top
H44  STAND-OFFTIGHT  [STAND-OFF-TIGHT]  9.4,202.69 180 top
H45  STAND-OFFTIGHT  [STAND-OFF-TIGHT]  42.42,144.27 0 top
H46  STAND-OFFTIGHT  [STAND-OFF-TIGHT]  42.42,268.99 90 top
H47  STAND-OFFTIGHT  [STAND-OFF-TIGHT]  9.4,268.99 180 top
H48  STAND-OFFTIGHT  [STAND-OFF-TIGHT]  42.42,210.57 0 top
J1  Audio Jack  [AUDIO-JACK-3.5MM-SMD]  148.53,9.27 90 top
J2  MICRO-SD_CARD_SOCKET  [MICRO-SD-SOCKET]  126.49,25.65 180 top
J3  [1X02]  159.51,25.65 90 top
J4  [6_PIN_SERIAL_TARGET_SIDE_W_SILK]  141.73,71.37 180 top
J5  [1X02]  159.51,40.89 90 top
J6  [1X05]  159.51,61.21 270 top
J7  [1X04]  123.95,53.59 90 top
J8  [1X02]  123.95,66.29 270 top
J9  [1X02]  159.51,63.75 90 top
J10  [1X02]  159.51,35.81 90 top
J11  [1X02]  159.51,30.73 90 top
J12  [1X01]  123.95,51.05 0 top
J13  Audio Jack  [AUDIO-JACK-3.5MM-SMD]  148.53,75.56 90 top
J14  [6_PIN_SERIAL_TARGET_SIDE_W_SILK]  141.73,137.67 180 top
J15  MICRO-SD_CARD_SOCKET  [MICRO-SD-SOCKET]  126.49,91.95 180 top
J16  [1X05]  159.51,127.51 270 top
J17  [1X04]  123.95,119.89 90 top
J18  [1X02]  159.51,91.95 90 top
J19  [1X02]  123.95,132.59 270 top
J20  [1X02]  159.51,130.05 90 top
J21  [1X02]  159.51,97.03 90 top
J22  [1X02]  159.51,107.19 90 top
J23  [1X02]  159.51,102.11 90 top
J24  [1X01]  123.95,117.35 0 top
J25  Audio Jack  [AUDIO-JACK-3.5MM-SMD]  148.53,141.86 90 top
J26  [6_PIN_SERIAL_TARGET_SIDE_W_SILK]  141.73,203.96 180 top
J27  MICRO-SD_CARD_SOCKET  [MICRO-SD-SOCKET]  126.49,158.24 180 top
J28  [1X05]  159.51,193.8 270 top
J29  [1X04]  123.95,186.18 90 top
J30  [1X02]  159.51,158.24 90 top
J31  [1X02]  123.95,198.88 270 top
J32  [1X02]  159.51,196.34 90 top
J33  [1X02]  159.51,163.32 90 top
J34  [1X02]  159.51,173.48 90 top
J35  [1X02]  159.51,168.4 90 top
J36  [1X01]  123.95,183.64 0 top
J37  Audio Jack  [AUDIO-JACK-3.5MM-SMD]  148.53,208.15 90 top
J38  [6_PIN_SERIAL_TARGET_SIDE_W_SILK]  141.73,270.26 180 top
J39  MICRO-SD_CARD_SOCKET  [MICRO-SD-SOCKET]  126.49,224.54 180 top
J40  [1X05]  159.51,260.1 270 top
J41  [1X04]  123.95,252.48 90 top
J42  [1X02]  159.51,224.54 90 top
J43  [1X02]  123.95,265.18 270 top
J44  [1X02]  159.51,262.64 90 top
J45  [1X02]  159.51,229.62 90 top
J46  [1X02]  159.51,239.78 90 top
J47  [1X02]  159.51,234.7 90 top
J48  [1X01]  123.95,249.94 0 top
J49  Audio Jack  [AUDIO-JACK-3.5MM-SMD]  109.92,9.27 90 top
J50  [6_PIN_SERIAL_TARGET_SIDE_W_SILK]  103.12,71.37 180 top
J51  MICRO-SD_CARD_SOCKET  [MICRO-SD-SOCKET]  87.88,25.65 180 top
J52  [1X05]  120.9,61.21 270 top
J53  [1X04]  85.34,53.59 90 top
J54  [1X02]  120.9,25.65 90 top
J55  [1X02]  85.34,66.29 270 top
J56  [1X02]  120.9,63.75 90 top
J57  [1X02]  120.9,30.73 90 top
J58  [1X02]  120.9,40.89 90 top
J59  [1X02]  120.9,35.81 90 top
J60  [1X01]  85.34,51.05 0 top
J61  Audio Jack  [AUDIO-JACK-3.5MM-SMD]  109.92,75.56 90 top
J62  [6_PIN_SERIAL_TARGET_SIDE_W_SILK]  103.12,137.67 180 top
J63  MICRO-SD_CARD_SOCKET  [MICRO-SD-SOCKET]  87.88,91.95 180 top
J64  [1X05]  120.9,127.51 270 top
J65  [1X04]  85.34,119.89 90 top
J66  [1X02]  120.9,91.95 90 top
J67  [1X02]  85.34,132.59 270 top
J68  [1X02]  120.9,130.05 90 top
J69  [1X02]  120.9,97.03 90 top
J70  [1X02]  120.9,107.19 90 top
J71  [1X02]  120.9,102.11 90 top
J72  [1X01]  85.34,117.35 0 top
J73  Audio Jack  [AUDIO-JACK-3.5MM-SMD]  109.92,141.86 90 top
J74  [6_PIN_SERIAL_TARGET_SIDE_W_SILK]  103.12,203.96 180 top
J75  MICRO-SD_CARD_SOCKET  [MICRO-SD-SOCKET]  87.88,158.24 180 top
J76  [1X05]  120.9,193.8 270 top
J77  [1X04]  85.34,186.18 90 top
J78  [1X02]  120.9,158.24 90 top
J79  [1X02]  85.34,198.88 270 top
J80  [1X02]  120.9,196.34 90 top
J81  [1X02]  120.9,163.32 90 top
J82  [1X02]  120.9,173.48 90 top
J83  [1X02]  120.9,168.4 90 top
J84  [1X01]  85.34,183.64 0 top
J85  Audio Jack  [AUDIO-JACK-3.5MM-SMD]  109.92,208.15 90 top
J86  [6_PIN_SERIAL_TARGET_SIDE_W_SILK]  103.12,270.26 180 top
J87  MICRO-SD_CARD_SOCKET  [MICRO-SD-SOCKET]  87.88,224.54 180 top
J88  [1X05]  120.9,260.1 270 top
J89  [1X04]  85.34,252.48 90 top
J90  [1X02]  120.9,224.54 90 top
J91  [1X02]  85.34,265.18 270 top
J92  [1X02]  120.9,262.64 90 top
J93  [1X02]  120.9,229.62 90 top
J94  [1X02]  120.9,239.78 90 top
J95  [1X02]  120.9,234.7 90 top
J96  [1X01]  85.34,249.94 0 top
J97  Audio Jack  [AUDIO-JACK-3.5MM-SMD]  71.31,9.27 90 top
J98  [6_PIN_SERIAL_TARGET_SIDE_W_SILK]  64.52,71.37 180 top
J99  MICRO-SD_CARD_SOCKET  [MICRO-SD-SOCKET]  49.28,25.65 180 top
J100  [1X05]  82.3,61.21 270 top
J101  [1X04]  46.74,53.59 90 top
J102  [1X02]  82.3,25.65 90 top
J103  [1X02]  46.74,66.29 270 top
J104  [1X02]  82.3,63.75 90 top
J105  [1X02]  82.3,30.73 90 top
J106  [1X02]  82.3,40.89 90 top
J107  [1X02]  82.3,35.81 90 top
J108  [1X01]  46.74,51.05 0 top
J109  Audio Jack  [AUDIO-JACK-3.5MM-SMD]  71.31,75.56 90 top
J110  [6_PIN_SERIAL_TARGET_SIDE_W_SILK]  64.52,137.67 180 top
J111  MICRO-SD_CARD_SOCKET  [MICRO-SD-SOCKET]  49.28,91.95 180 top
J112  [1X05]  82.3,127.51 270 top
J113  [1X04]  46.74,119.89 90 top
J114  [1X02]  82.3,91.95 90 top
J115  [1X02]  46.74,132.59 270 top
J116  [1X02]  82.3,130.05 90 top
J117  [1X02]  82.3,97.03 90 top
J118  [1X02]  82.3,107.19 90 top
J119  [1X02]  82.3,102.11 90 top
J120  [1X01]  46.74,117.35 0 top
J121  Audio Jack  [AUDIO-JACK-3.5MM-SMD]  71.31,141.86 90 top
J122  [6_PIN_SERIAL_TARGET_SIDE_W_SILK]  64.52,203.96 180 top
J123  MICRO-SD_CARD_SOCKET  [MICRO-SD-SOCKET]  49.28,158.24 180 top
J124  [1X05]  82.3,193.8 270 top
J125  [1X04]  46.74,186.18 90 top
J126  [1X02]  82.3,158.24 90 top
J127  [1X02]  46.74,198.88 270 top
J128  [1X02]  82.3,196.34 90 top
J129  [1X02]  82.3,163.32 90 top
J130  [1X02]  82.3,173.48 90 top
J131  [1X02]  82.3,168.4 90 top
J132  [1X01]  46.74,183.64 0 top
J133  Audio Jack  [AUDIO-JACK-3.5MM-SMD]  71.31,208.15 90 top
J134  [6_PIN_SERIAL_TARGET_SIDE_W_SILK]  64.52,270.26 180 top
J135  MICRO-SD_CARD_SOCKET  [MICRO-SD-SOCKET]  49.28,224.54 180 top
J136  [1X05]  82.3,260.1 270 top
J137  [1X04]  46.74,252.48 90 top
J138  [1X02]  82.3,224.54 90 top
J139  [1X02]  46.74,265.18 270 top
J140  [1X02]  82.3,262.64 90 top
J141  [1X02]  82.3,229.62 90 top
J142  [1X02]  82.3,239.78 90 top
J143  [1X02]  82.3,234.7 90 top
J144  [1X01]  46.74,249.94 0 top
J145  Audio Jack  [AUDIO-JACK-3.5MM-SMD]  32.7,9.27 90 top
J146  [6_PIN_SERIAL_TARGET_SIDE_W_SILK]  25.91,71.37 180 top
J147  MICRO-SD_CARD_SOCKET  [MICRO-SD-SOCKET]  10.67,25.65 180 top
J148  [1X05]  43.69,61.21 270 top
J149  [1X04]  8.13,53.59 90 top
J150  [1X02]  43.69,25.65 90 top
J151  [1X02]  8.13,66.29 270 top
J152  [1X02]  43.69,63.75 90 top
J153  [1X02]  43.69,30.73 90 top
J154  [1X02]  43.69,40.89 90 top
J155  [1X02]  43.69,35.81 90 top
J156  [1X01]  8.13,51.05 0 top
J157  Audio Jack  [AUDIO-JACK-3.5MM-SMD]  32.7,75.56 90 top
J158  [6_PIN_SERIAL_TARGET_SIDE_W_SILK]  25.91,137.67 180 top
J159  MICRO-SD_CARD_SOCKET  [MICRO-SD-SOCKET]  10.67,91.95 180 top
J160  [1X05]  43.69,127.51 270 top
J161  [1X04]  8.13,119.89 90 top
J162  [1X02]  43.69,91.95 90 top
J163  [1X02]  8.13,132.59 270 top
J164  [1X02]  43.69,130.05 90 top
J165  [1X02]  43.69,97.03 90 top
J166  [1X02]  43.69,107.19 90 top
J167  [1X02]  43.69,102.11 90 top
J168  [1X01]  8.13,117.35 0 top
J169  Audio Jack  [AUDIO-JACK-3.5MM-SMD]  32.7,141.86 90 top
J170  [6_PIN_SERIAL_TARGET_SIDE_W_SILK]  25.91,203.96 180 top
J171  MICRO-SD_CARD_SOCKET  [MICRO-SD-SOCKET]  10.67,158.24 180 top
J172  [1X05]  43.69,193.8 270 top
J173  [1X04]  8.13,186.18 90 top
J174  [1X02]  43.69,158.24 90 top
J175  [1X02]  8.13,198.88 270 top
J176  [1X02]  43.69,196.34 90 top
J177  [1X02]  43.69,163.32 90 top
J178  [1X02]  43.69,173.48 90 top
J179  [1X02]  43.69,168.4 90 top
J180  [1X01]  8.13,183.64 0 top
J181  Audio Jack  [AUDIO-JACK-3.5MM-SMD]  32.7,208.15 90 top
J182  [6_PIN_SERIAL_TARGET_SIDE_W_SILK]  25.91,270.26 180 top
J183  MICRO-SD_CARD_SOCKET  [MICRO-SD-SOCKET]  10.67,224.54 180 top
J184  [1X05]  43.69,260.1 270 top
J185  [1X04]  8.13,252.48 90 top
J186  [1X02]  43.69,224.54 90 top
J187  [1X02]  8.13,265.18 270 top
J188  [1X02]  43.69,262.64 90 top
J189  [1X02]  43.69,229.62 90 top
J190  [1X02]  43.69,239.78 90 top
J191  [1X02]  43.69,234.7 90 top
J192  [1X01]  8.13,249.94 0 top
LOGO1  OSHW-LOGOL  [OSHW-LOGO-L]  141.67,40.39 0 bottom
LOGO2  SFE_LOGO_FLAME.2_INCH  [SFE_LOGO_FLAME_.2]  129.92,32 0 top
LOGO3  OSHW-LOGOL  [OSHW-LOGO-M]  147.8,52.58 0 top
LOGO4  OSHW-LOGOL  [OSHW-LOGO-L]  141.67,106.68 0 bottom
LOGO5  SFE_LOGO_FLAME.2_INCH  [SFE_LOGO_FLAME_.2]  129.92,98.3 0 top
LOGO6  SFE_LOGO_NAME_FLAME.1_INCH  [SFE_LOGO_NAME_FLAME_.2]  153.55,53.34 0 bottom
LOGO7  SFE_LOGO_NAME_FLAME.1_INCH  [SFE_LOGO_NAME_FLAME_.2]  153.55,119.63 0 bottom
LOGO8  OSHW-LOGOL  [OSHW-LOGO-M]  147.8,118.87 0 top
LOGO9  OSHW-LOGOL  [OSHW-LOGO-L]  141.67,172.97 0 bottom
LOGO10  SFE_LOGO_FLAME.2_INCH  [SFE_LOGO_FLAME_.2]  129.92,164.59 0 top
LOGO11  SFE_LOGO_NAME_FLAME.1_INCH  [SFE_LOGO_NAME_FLAME_.2]  153.55,185.93 0 bottom
LOGO12  OSHW-LOGOL  [OSHW-LOGO-M]  147.8,185.17 0 top
LOGO13  OSHW-LOGOL  [OSHW-LOGO-L]  141.67,239.27 0 bottom
LOGO14  SFE_LOGO_FLAME.2_INCH  [SFE_LOGO_FLAME_.2]  129.92,230.89 0 top
LOGO15  SFE_LOGO_NAME_FLAME.1_INCH  [SFE_LOGO_NAME_FLAME_.2]  153.55,252.22 0 bottom
LOGO16  OSHW-LOGOL  [OSHW-LOGO-M]  147.8,251.46 0 top
LOGO17  OSHW-LOGOL  [OSHW-LOGO-L]  103.06,40.39 0 bottom
LOGO18  SFE_LOGO_FLAME.2_INCH  [SFE_LOGO_FLAME_.2]  91.31,32 0 top
LOGO19  SFE_LOGO_NAME_FLAME.1_INCH  [SFE_LOGO_NAME_FLAME_.2]  114.94,53.34 0 bottom
LOGO20  OSHW-LOGOL  [OSHW-LOGO-M]  109.19,52.58 0 top
LOGO21  OSHW-LOGOL  [OSHW-LOGO-L]  103.06,106.68 0 bottom
LOGO22  SFE_LOGO_FLAME.2_INCH  [SFE_LOGO_FLAME_.2]  91.31,98.3 0 top
LOGO23  SFE_LOGO_NAME_FLAME.1_INCH  [SFE_LOGO_NAME_FLAME_.2]  114.94,119.63 0 bottom
LOGO24  OSHW-LOGOL  [OSHW-LOGO-M]  109.19,118.87 0 top
LOGO25  OSHW-LOGOL  [OSHW-LOGO-L]  103.06,172.97 0 bottom
LOGO26  SFE_LOGO_FLAME.2_INCH  [SFE_LOGO_FLAME_.2]  91.31,164.59 0 top
LOGO27  SFE_LOGO_NAME_FLAME.1_INCH  [SFE_LOGO_NAME_FLAME_.2]  114.94,185.93 0 bottom
LOGO28  OSHW-LOGOL  [OSHW-LOGO-M]  109.19,185.17 0 top
LOGO29  OSHW-LOGOL  [OSHW-LOGO-L]  103.06,239.27 0 bottom
LOGO30  SFE_LOGO_FLAME.2_INCH  [SFE_LOGO_FLAME_.2]  91.31,230.89 0 top
LOGO31  SFE_LOGO_NAME_FLAME.1_INCH  [SFE_LOGO_NAME_FLAME_.2]  114.94,252.22 0 bottom
LOGO32  OSHW-LOGOL  [OSHW-LOGO-M]  109.19,251.46 0 top
LOGO33  OSHW-LOGOL  [OSHW-LOGO-L]  64.45,40.39 0 bottom
LOGO34  SFE_LOGO_FLAME.2_INCH  [SFE_LOGO_FLAME_.2]  52.7,32 0 top
LOGO35  SFE_LOGO_NAME_FLAME.1_INCH  [SFE_LOGO_NAME_FLAME_.2]  76.34,53.34 0 bottom
LOGO36  OSHW-LOGOL  [OSHW-LOGO-M]  70.58,52.58 0 top
LOGO37  OSHW-LOGOL  [OSHW-LOGO-L]  64.45,106.68 0 bottom
LOGO38  SFE_LOGO_FLAME.2_INCH  [SFE_LOGO_FLAME_.2]  52.7,98.3 0 top
LOGO39  SFE_LOGO_NAME_FLAME.1_INCH  [SFE_LOGO_NAME_FLAME_.2]  76.34,119.63 0 bottom
LOGO40  OSHW-LOGOL  [OSHW-LOGO-M]  70.58,118.87 0 top
LOGO41  OSHW-LOGOL  [OSHW-LOGO-L]  64.45,172.97 0 bottom
LOGO42  SFE_LOGO_FLAME.2_INCH  [SFE_LOGO_FLAME_.2]  52.7,164.59 0 top
LOGO43  SFE_LOGO_NAME_FLAME.1_INCH  [SFE_LOGO_NAME_FLAME_.2]  76.34,185.93 0 bottom
LOGO44  OSHW-LOGOL  [OSHW-LOGO-M]  70.58,185.17 0 top
LOGO45  OSHW-LOGOL  [OSHW-LOGO-L]  64.45,239.27 0 bottom
LOGO46  SFE_LOGO_FLAME.2_INCH  [SFE_LOGO_FLAME_.2]  52.7,230.89 0 top
LOGO47  SFE_LOGO_NAME_FLAME.1_INCH  [SFE_LOGO_NAME_FLAME_.2]  76.34,252.22 0 bottom
LOGO48  OSHW-LOGOL  [OSHW-LOGO-M]  70.58,251.46 0 top
LOGO49  OSHW-LOGOL  [OSHW-LOGO-L]  25.84,40.39 0 bottom
LOGO50  SFE_LOGO_FLAME.2_INCH  [SFE_LOGO_FLAME_.2]  14.1,32 0 top
LOGO51  SFE_LOGO_NAME_FLAME.1_INCH  [SFE_LOGO_NAME_FLAME_.2]  37.73,53.34 0 bottom
LOGO52  OSHW-LOGOL  [OSHW-LOGO-M]  31.97,52.58 0 top
LOGO53  OSHW-LOGOL  [OSHW-LOGO-L]  25.84,106.68 0 bottom
LOGO54  SFE_LOGO_FLAME.2_INCH  [SFE_LOGO_FLAME_.2]  14.1,98.3 0 top
LOGO55  SFE_LOGO_NAME_FLAME.1_INCH  [SFE_LOGO_NAME_FLAME_.2]  37.73,119.63 0 bottom
LOGO56  OSHW-LOGOL  [OSHW-LOGO-M]  31.97,118.87 0 top
LOGO57  OSHW-LOGOL  [OSHW-LOGO-L]  25.84,172.97 0 bottom
LOGO58  SFE_LOGO_FLAME.2_INCH  [SFE_LOGO_FLAME_.2]  14.1,164.59 0 top
LOGO59  SFE_LOGO_NAME_FLAME.1_INCH  [SFE_LOGO_NAME_FLAME_.2]  37.73,185.93 0 bottom
LOGO60  OSHW-LOGOL  [OSHW-LOGO-M]  31.97,185.17 0 top
LOGO61  OSHW-LOGOL  [OSHW-LOGO-L]  25.84,239.27 0 bottom
LOGO62  SFE_LOGO_FLAME.2_INCH  [SFE_LOGO_FLAME_.2]  14.1,230.89 0 top
LOGO63  SFE_LOGO_NAME_FLAME.1_INCH  [SFE_LOGO_NAME_FLAME_.2]  37.73,252.22 0 bottom
LOGO64  OSHW-LOGOL  [OSHW-LOGO-M]  31.97,251.46 0 top
R1  1M  [0603-RES]  149.19,43.28 270 top
R2  100k  [0603-RES]  143,29.46 90 top
R3  100k  [0603-RES]  127.76,29.46 90 top
R4  10K  [0603-RES]  143,16.45 0 top
R5  10K  [0603-RES]  153.48,25.65 180 top
R6  470  [0603-RES]  153.8,18.51 180 top
R7  470  [0603-RES]  143,20.26 0 top
R8  20  [0603-RES]  143,21.84 0 top
R9  10k  [0603]  152.53,69.47 180 top
R10  20  [0603-RES]  153.8,16.76 180 top
R11  100k  [0603-RES]  125.09,34.92 180 top
R12  100k  [0603-RES]  125.09,44.45 180 top
R13  100k  [0603-RES]  140.46,29.46 270 top
R14  1M  [0603-RES]  149.19,109.57 270 top
R15  1M  [0603-RES]  148.56,48.51 180 top
R16  100k  [0603-RES]  153.48,33.12 180 top
R17  330  [0603]  153.8,58.04 180 top
R18  2.0k  [0603]  131.32,38.86 0 top
R19  100k  [0603-RES]  137.92,29.46 270 top
R20  100k  [0603-RES]  135.38,29.46 270 top
R21  100k  [0603-RES]  130.3,29.46 270 top
R22  100k  [0603-RES]  125.09,33.02 180 top
R23  100k  [0603-RES]  125.09,46.67 0 top
R24  100k  [0603-RES]  132.84,29.46 270 top
R25  100k  [0603-RES]  146.02,32 0 top
R26  2.0k  [0603]  129.03,66.42 0 top
R27  10  [0603-RES]  140.72,51.56 90 top
R28  100k  [0603-RES]  125.09,42.55 180 top
R29  100k  [0603-RES]  125.09,40.64 180 top
R30  100k  [0603-RES]  125.09,38.73 180 top
R31  100k  [0603-RES]  125.09,36.83 180 top
R32  1M  [0603-RES]  148.56,114.81 180 top
R33  10K  [0603-RES]  143,82.74 0 top
R34  10K  [0603-RES]  153.48,91.95 180 top
R35  470  [0603-RES]  153.8,84.8 180 top
R36  470  [0603-RES]  143,86.55 0 top
R37  20  [0603-RES]  143,88.14 0 top
R38  20  [0603-RES]  153.8,83.06 180 top
R39  100k  [0603-RES]  140.46,95.76 270 top
R40  100k  [0603-RES]  137.92,95.76 270 top
R41  100k  [0603-RES]  135.38,95.76 270 top
R42  100k  [0603-RES]  130.3,95.76 270 top
R43  100k  [0603-RES]  125.09,99.31 180 top
R44  100k  [0603-RES]  125.09,112.97 0 top
R45  100k  [0603-RES]  132.84,95.76 270 top
R46  10  [0603-RES]  140.72,117.86 90 top
R47  10k  [0603]  152.53,135.76 180 top
R48  330  [0603]  153.8,124.33 180 top
R49  100k  [0603-RES]  143,95.76 90 top
R50  100k  [0603-RES]  127.76,95.76 90 top
R51  100k  [0603-RES]  125.09,101.22 180 top
R52  100k  [0603-RES]  125.09,110.74 180 top
R53  100k  [0603-RES]  125.09,108.84 180 top
R54  100k  [0603-RES]  125.09,106.93 180 top
R55  100k  [0603-RES]  125.09,105.03 180 top
R56  100k  [0603-RES]  125.09,103.12 180 top
R57  100k  [0603-RES]  153.48,99.41 180 top
R58  100k  [0603-RES]  146.02,98.3 0 top
R59  2.0k  [0603]  131.32,105.16 0 top
R60  2.0k  [0603]  129.03,132.72 0 top
R61  1M  [0603-RES]  149.19,175.86 270 top
R62  1M  [0603-RES]  148.56,181.1 180 top
R63  10K  [0603-RES]  143,149.03 0 top
R64  10K  [0603-RES]  153.48,158.24 180 top
R65  470  [0603-RES]  153.8,151.1 180 top
R66  470  [0603-RES]  143,152.84 0 top
R67  20  [0603-RES]  143,154.43 0 top
R68  20  [0603-RES]  153.8,149.35 180 top
R69  100k  [0603-RES]  140.46,162.05 270 top
R70  100k  [0603-RES]  137.92,162.05 270 top
R71  100k  [0603-RES]  135.38,162.05 270 top
R72  100k  [0603-RES]  130.3,162.05 270 top
R73  100k  [0603-RES]  125.09,165.61 180 top
R74  100k  [0603-RES]  125.09,179.26 0 top
R75  100k  [0603-RES]  132.84,162.05 270 top
R76  10  [0603-RES]  140.72,184.15 90 top
R77  10k  [0603]  152.53,202.06 180 top
R78  330  [0603]  153.8,190.63 180 top
R79  100k  [0603-RES]  143,162.05 90 top
R80  100k  [0603-RES]  127.76,162.05 90 top
R81  100k  [0603-RES]  125.09,167.51 180 top
R82  100k  [0603-RES]  125.09,177.04 180 top
R83  100k  [0603-RES]  125.09,175.13 180 top
R84  100k  [0603-RES]  125.09,173.23 180 top
R85  100k  [0603-RES]  125.09,171.32 180 top
R86  100k  [0603-RES]  125.09,169.42 180 top
R87  100k  [0603-RES]  153.48,165.7 180 top
R88  100k  [0603-RES]  146.02,164.59 0 top
R89  2.0k  [0603]  131.32,171.45 0 top
R90  2.0k  [0603]  129.03,199.01 0 top
R91  1M  [0603-RES]  149.19,242.16 270 top
R92  1M  [0603-RES]  148.56,247.4 180 top
R93  10K  [0603-RES]  143,215.33 0 top
R94  10K  [0603-RES]  153.48,224.54 180 top
R95  470  [0603-RES]  153.8,217.39 180 top
R96  470  [0603-RES]  143,219.14 0 top
R97  20  [0603-RES]  143,220.73 0 top
R98  20  [0603-RES]  153.8,215.65 180 top
R99  100k  [0603-RES]  140.46,228.35 270 top
R100  100k  [0603-RES]  137.92,228.35 270 top
R101  100k  [0603-RES]  135.38,228.35 270 top
R102  100k  [0603-RES]  130.3,228.35 270 top
R103  100k  [0603-RES]  125.09,231.9 180 top
R104  100k  [0603-RES]  125.09,245.55 0 top
R105  100k  [0603-RES]  132.84,228.35 270 top
R106  10  [0603-RES]  140.72,250.44 90 top
R107  10k  [0603]  152.53,268.35 180 top
R108  330  [0603]  153.8,256.92 180 top
R109  100k  [0603-RES]  143,228.35 90 top
R110  100k  [0603-RES]  127.76,228.35 90 top
R111  100k  [0603-RES]  125.09,233.81 180 top
R112  100k  [0603-RES]  125.09,243.33 180 top
R113  100k  [0603-RES]  125.09,241.43 180 top
R114  100k  [0603-RES]  125.09,239.52 180 top
R115  100k  [0603-RES]  125.09,237.62 180 top
R116  100k  [0603-RES]  125.09,235.71 180 top
R117  100k  [0603-RES]  153.48,232 180 top
R118  100k  [0603-RES]  146.02,230.89 0 top
R119  2.0k  [0603]  131.32,237.74 0 top
R120  2.0k  [0603]  129.03,265.3 0 top
R121  1M  [0603-RES]  110.59,43.28 270 top
R122  1M  [0603-RES]  109.95,48.51 180 top
R123  10K  [0603-RES]  104.39,16.45 0 top
R124  10K  [0603-RES]  114.87,25.65 180 top
R125  470  [0603-RES]  115.19,18.51 180 top
R126  470  [0603-RES]  104.39,20.26 0 top
R127  20  [0603-RES]  104.39,21.84 0 top
R128  20  [0603-RES]  115.19,16.76 180 top
R129  100k  [0603-RES]  101.85,29.46 270 top
R130  100k  [0603-RES]  99.31,29.46 270 top
R131  100k  [0603-RES]  96.77,29.46 270 top
R132  100k  [0603-RES]  91.69,29.46 270 top
R133  100k  [0603-RES]  86.49,33.02 180 top
R134  100k  [0603-RES]  86.49,46.67 0 top
R135  100k  [0603-RES]  94.23,29.46 270 top
R136  10  [0603-RES]  102.11,51.56 90 top
R137  10k  [0603]  113.92,69.47 180 top
R138  330  [0603]  115.19,58.04 180 top
R139  100k  [0603-RES]  104.39,29.46 90 top
R140  100k  [0603-RES]  89.15,29.46 90 top
R141  100k  [0603-RES]  86.49,34.92 180 top
R142  100k  [0603-RES]  86.49,44.45 180 top
R143  100k  [0603-RES]  86.49,42.55 180 top
R144  100k  [0603-RES]  86.49,40.64 180 top
R145  100k  [0603-RES]  86.49,38.73 180 top
R146  100k  [0603-RES]  86.49,36.83 180 top
R147  100k  [0603-RES]  114.87,33.12 180 top
R148  100k  [0603-RES]  107.41,32 0 top
R149  2.0k  [0603]  92.71,38.86 0 top
R150  2.0k  [0603]  90.42,66.42 0 top
R151  1M  [0603-RES]  110.59,109.57 270 top
R152  1M  [0603-RES]  109.95,114.81 180 top
R153  10K  [0603-RES]  104.39,82.74 0 top
R154  10K  [0603-RES]  114.87,91.95 180 top
R155  470  [0603-RES]  115.19,84.8 180 top
R156  470  [0603-RES]  104.39,86.55 0 top
R157  20  [0603-RES]  104.39,88.14 0 top
R158  20  [0603-RES]  115.19,83.06 180 top
R159  100k  [0603-RES]  101.85,95.76 270 top
R160  100k  [0603-RES]  99.31,95.76 270 top
R161  100k  [0603-RES]  96.77,95.76 270 top
R162  100k  [0603-RES]  91.69,95.76 270 top
R163  100k  [0603-RES]  86.49,99.31 180 top
R164  100k  [0603-RES]  86.49,112.97 0 top
R165  100k  [0603-RES]  94.23,95.76 270 top
R166  10  [0603-RES]  102.11,117.86 90 top
R167  10k  [0603]  113.92,135.76 180 top
R168  330  [0603]  115.19,124.33 180 top
R169  100k  [0603-RES]  104.39,95.76 90 top
R170  100k  [0603-RES]  89.15,95.76 90 top
R171  100k  [0603-RES]  86.49,101.22 180 top
R172  100k  [0603-RES]  86.49,110.74 180 top
R173  100k  [0603-RES]  86.49,108.84 180 top
R174  100k  [0603-RES]  86.49,106.93 180 top
R175  100k  [0603-RES]  86.49,105.03 180 top
R176  100k  [0603-RES]  86.49,103.12 180 top
R177  100k  [0603-RES]  114.87,99.41 180 top
R178  100k  [0603-RES]  107.41,98.3 0 top
R179  2.0k  [0603]  92.71,105.16 0 top
R180  2.0k  [0603]  90.42,132.72 0 top
R181  1M  [0603-RES]  110.59,175.86 270 top
R182  1M  [0603-RES]  109.95,181.1 180 top
R183  10K  [0603-RES]  104.39,149.03 0 top
R184  10K  [0603-RES]  114.87,158.24 180 top
R185  470  [0603-RES]  115.19,151.1 180 top
R186  470  [0603-RES]  104.39,152.84 0 top
R187  20  [0603-RES]  104.39,154.43 0 top
R188  20  [0603-RES]  115.19,149.35 180 top
R189  100k  [0603-RES]  101.85,162.05 270 top
R190  100k  [0603-RES]  99.31,162.05 270 top
R191  100k  [0603-RES]  96.77,162.05 270 top
R192  100k  [0603-RES]  91.69,162.05 270 top
R193  100k  [0603-RES]  86.49,165.61 180 top
R194  100k  [0603-RES]  86.49,179.26 0 top
R195  100k  [0603-RES]  94.23,162.05 270 top
R196  10  [0603-RES]  102.11,184.15 90 top
R197  10k  [0603]  113.92,202.06 180 top
R198  330  [0603]  115.19,190.63 180 top
R199  100k  [0603-RES]  104.39,162.05 90 top
R200  100k  [0603-RES]  89.15,162.05 90 top
R201  100k  [0603-RES]  86.49,167.51 180 top
R202  100k  [0603-RES]  86.49,177.04 180 top
R203  100k  [0603-RES]  86.49,175.13 180 top
R204  100k  [0603-RES]  86.49,173.23 180 top
R205  100k  [0603-RES]  86.49,171.32 180 top
R206  100k  [0603-RES]  86.49,169.42 180 top
R207  100k  [0603-RES]  114.87,165.7 180 top
R208  100k  [0603-RES]  107.41,164.59 0 top
R209  2.0k  [0603]  92.71,171.45 0 top
R210  2.0k  [0603]  90.42,199.01 0 top
R211  1M  [0603-RES]  110.59,242.16 270 top
R212  1M  [0603-RES]  109.95,247.4 180 top
R213  10K  [0603-RES]  104.39,215.33 0 top
R214  10K  [0603-RES]  114.87,224.54 180 top
R215  470  [0603-RES]  115.19,217.39 180 top
R216  470  [0603-RES]  104.39,219.14 0 top
R217  20  [0603-RES]  104.39,220.73 0 top
R218  20  [0603-RES]  115.19,215.65 180 top
R219  100k  [0603-RES]  101.85,228.35 270 top
R220  100k  [0603-RES]  99.31,228.35 270 top
R221  100k  [0603-RES]  96.77,228.35 270 top
R222  100k  [0603-RES]  91.69,228.35 270 top
R223  100k  [0603-RES]  86.49,231.9 180 top
R224  100k  [0603-RES]  86.49,245.55 0 top
R225  100k  [0603-RES]  94.23,228.35 270 top
R226  10  [0603-RES]  102.11,250.44 90 top
R227  10k  [0603]  113.92,268.35 180 top
R228  330  [0603]  115.19,256.92 180 top
R229  100k  [0603-RES]  104.39,228.35 90 top
R230  100k  [0603-RES]  89.15,228.35 90 top
R231  100k  [0603-RES]  86.49,233.81 180 top
R232  100k  [0603-RES]  86.49,243.33 180 top
R233  100k  [0603-RES]  86.49,241.43 180 top
R234  100k  [0603-RES]  86.49,239.52 180 top
R235  100k  [0603-RES]  86.49,237.62 180 top
R236  100k  [0603-RES]  86.49,235.71 180 top
R237  100k  [0603-RES]  114.87,232 180 top
R238  100k  [0603-RES]  107.41,230.89 0 top
R239  2.0k  [0603]  92.71,237.74 0 top
R240  2.0k  [0603]  90.42,265.3 0 top
R241  1M  [0603-RES]  71.98,43.28 270 top
R242  1M  [0603-RES]  71.34,48.51 180 top
R243  10K  [0603-RES]  65.79,16.45 0 top
R244  10K  [0603-RES]  76.26,25.65 180 top
R245  470  [0603-RES]  76.58,18.51 180 top
R246  470  [0603-RES]  65.79,20.26 0 top
R247  20  [0603-RES]  65.79,21.84 0 top
R248  20  [0603-RES]  76.58,16.76 180 top
R249  100k  [0603-RES]  63.25,29.46 270 top
R250  100k  [0603-RES]  60.71,29.46 270 top
R251  100k  [0603-RES]  58.17,29.46 270 top
R252  100k  [0603-RES]  53.09,29.46 270 top
R253  100k  [0603-RES]  47.88,33.02 180 top
R254  100k  [0603-RES]  47.88,46.67 0 top
R255  100k  [0603-RES]  55.63,29.46 270 top
R256  10  [0603-RES]  63.5,51.56 90 top
R257  10k  [0603]  75.31,69.47 180 top
R258  330  [0603]  76.58,58.04 180 top
R259  100k  [0603-RES]  65.79,29.46 90 top
R260  100k  [0603-RES]  50.55,29.46 90 top
R261  100k  [0603-RES]  47.88,34.92 180 top
R262  100k  [0603-RES]  47.88,44.45 180 top
R263  100k  [0603-RES]  47.88,42.55 180 top
R264  100k  [0603-RES]  47.88,40.64 180 top
R265  100k  [0603-RES]  47.88,38.73 180 top
R266  100k  [0603-RES]  47.88,36.83 180 top
R267  100k  [0603-RES]  76.26,33.12 180 top
R268  100k  [0603-RES]  68.8,32 0 top
R269  2.0k  [0603]  54.1,38.86 0 top
R270  2.0k  [0603]  51.82,66.42 0 top
R271  1M  [0603-RES]  71.98,109.57 270 top
R272  1M  [0603-RES]  71.34,114.81 180 top
R273  10K  [0603-RES]  65.79,82.74 0 top
R274  10K  [0603-RES]  76.26,91.95 180 top
R275  470  [0603-RES]  76.58,84.8 180 top
R276  470  [0603-RES]  65.79,86.55 0 top
R277  20  [0603-RES]  65.79,88.14 0 top
R278  20  [0603-RES]  76.58,83.06 180 top
R279  100k  [0603-RES]  63.25,95.76 270 top
R280  100k  [0603-RES]  60.71,95.76 270 top
R281  100k  [0603-RES]  58.17,95.76 270 top
R282  100k  [0603-RES]  53.09,95.76 270 top
R283  100k  [0603-RES]  47.88,99.31 180 top
R284  100k  [0603-RES]  47.88,112.97 0 top
R285  100k  [0603-RES]  55.63,95.76 270 top
R286  10  [0603-RES]  63.5,117.86 90 top
R287  10k  [0603]  75.31,135.76 180 top
R288  330  [0603]  76.58,124.33 180 top
R289  100k  [0603-RES]  65.79,95.76 90 top
R290  100k  [0603-RES]  50.55,95.76 90 top
R291  100k  [0603-RES]  47.88,101.22 180 top
R292  100k  [0603-RES]  47.88,110.74 180 top
R293  100k  [0603-RES]  47.88,108.84 180 top
R294  100k  [0603-RES]  47.88,106.93 180 top
R295  100k  [0603-RES]  47.88,105.03 180 top
R296  100k  [0603-RES]  47.88,103.12 180 top
R297  100k  [0603-RES]  76.26,99.41 180 top
R298  100k  [0603-RES]  68.8,98.3 0 top
R299  2.0k  [0603]  54.1,105.16 0 top
R300  2.0k  [0603]  51.82,132.72 0 top
R301  1M  [0603-RES]  71.98,175.86 270 top
R302  1M  [0603-RES]  71.34,181.1 180 top
R303  10K  [0603-RES]  65.79,149.03 0 top
R304  10K  [0603-RES]  76.26,158.24 180 top
R305  470  [0603-RES]  76.58,151.1 180 top
R306  470  [0603-RES]  65.79,152.84 0 top
R307  20  [0603-RES]  65.79,154.43 0 top
R308  20  [0603-RES]  76.58,149.35 180 top
R309  100k  [0603-RES]  63.25,162.05 270 top
R310  100k  [0603-RES]  60.71,162.05 270 top
R311  100k  [0603-RES]  58.17,162.05 270 top
R312  100k  [0603-RES]  53.09,162.05 270 top
R313  100k  [0603-RES]  47.88,165.61 180 top
R314  100k  [0603-RES]  47.88,179.26 0 top
R315  100k  [0603-RES]  55.63,162.05 270 top
R316  10  [0603-RES]  63.5,184.15 90 top
R317  10k  [0603]  75.31,202.06 180 top
R318  330  [0603]  76.58,190.63 180 top
R319  100k  [0603-RES]  65.79,162.05 90 top
R320  100k  [0603-RES]  50.55,162.05 90 top
R321  100k  [0603-RES]  47.88,167.51 180 top
R322  100k  [0603-RES]  47.88,177.04 180 top
R323  100k  [0603-RES]  47.88,175.13 180 top
R324  100k  [0603-RES]  47.88,173.23 180 top
R325  100k  [0603-RES]  47.88,171.32 180 top